# EAGLE board 04A-005-A101 (EAGLE 9.6.2)
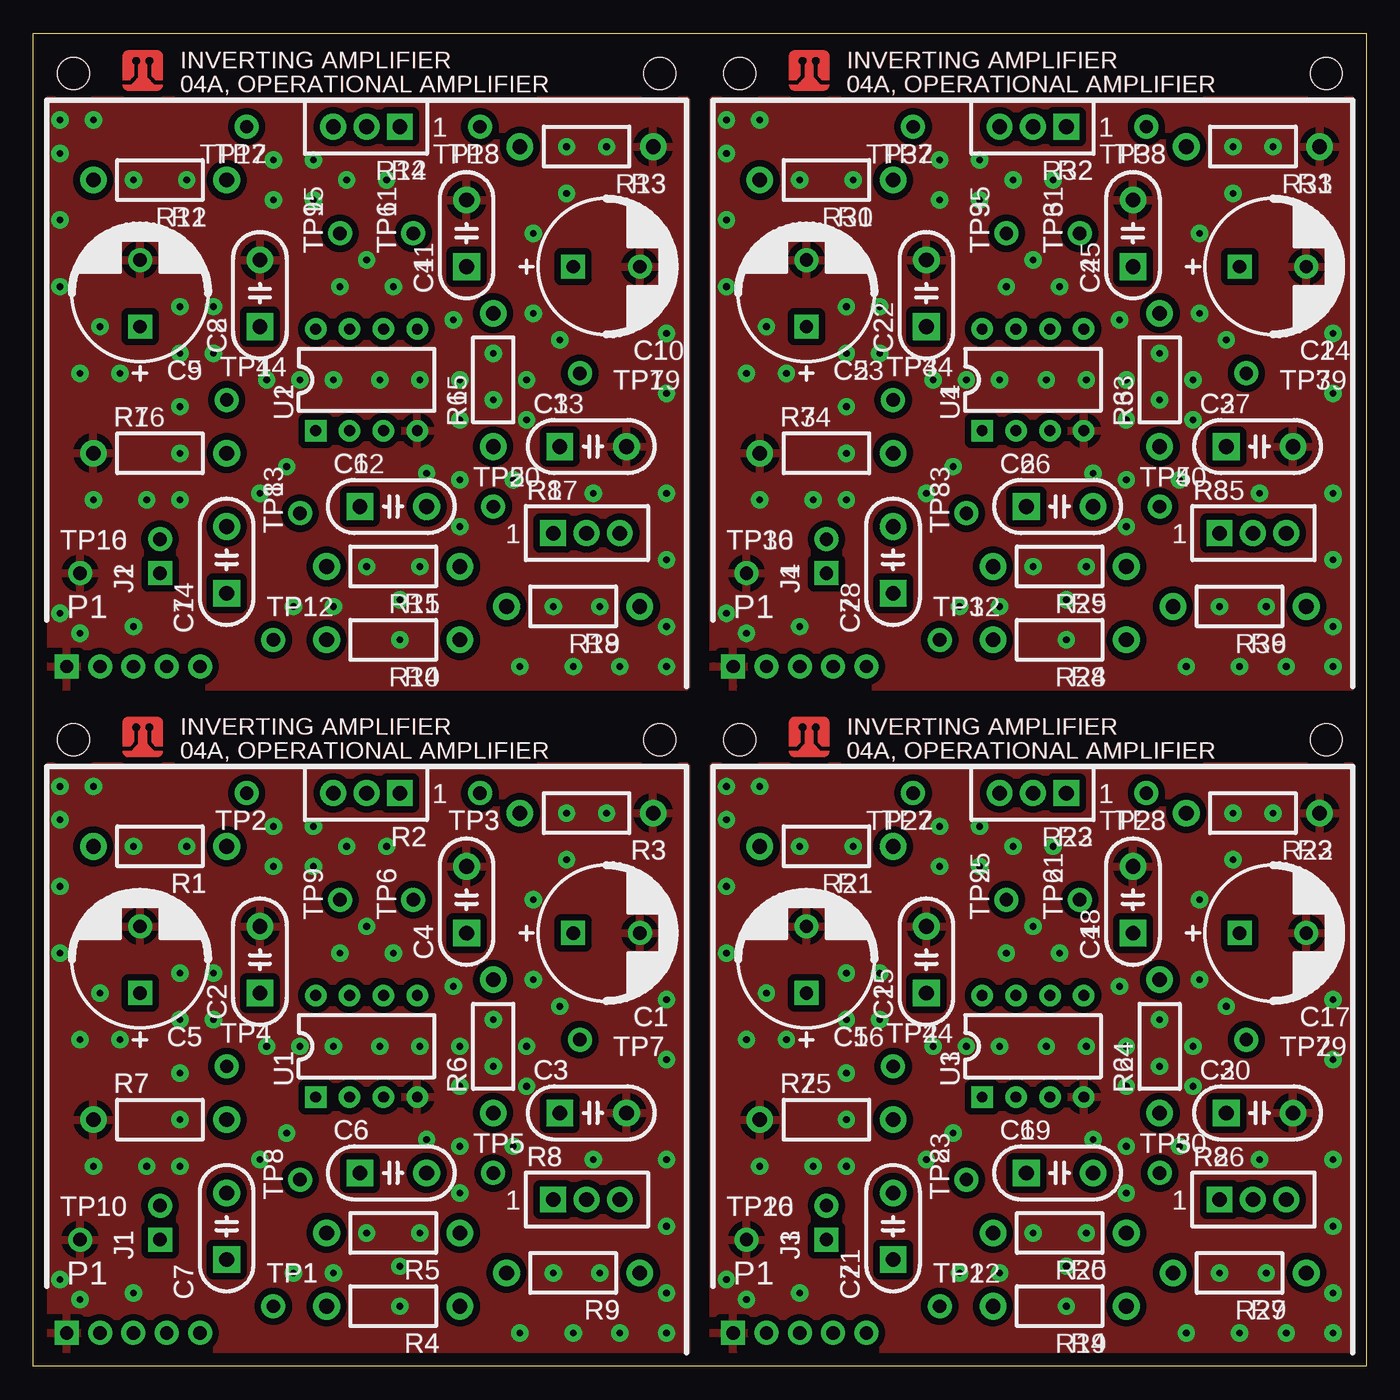
[diagram p0: board, top side]
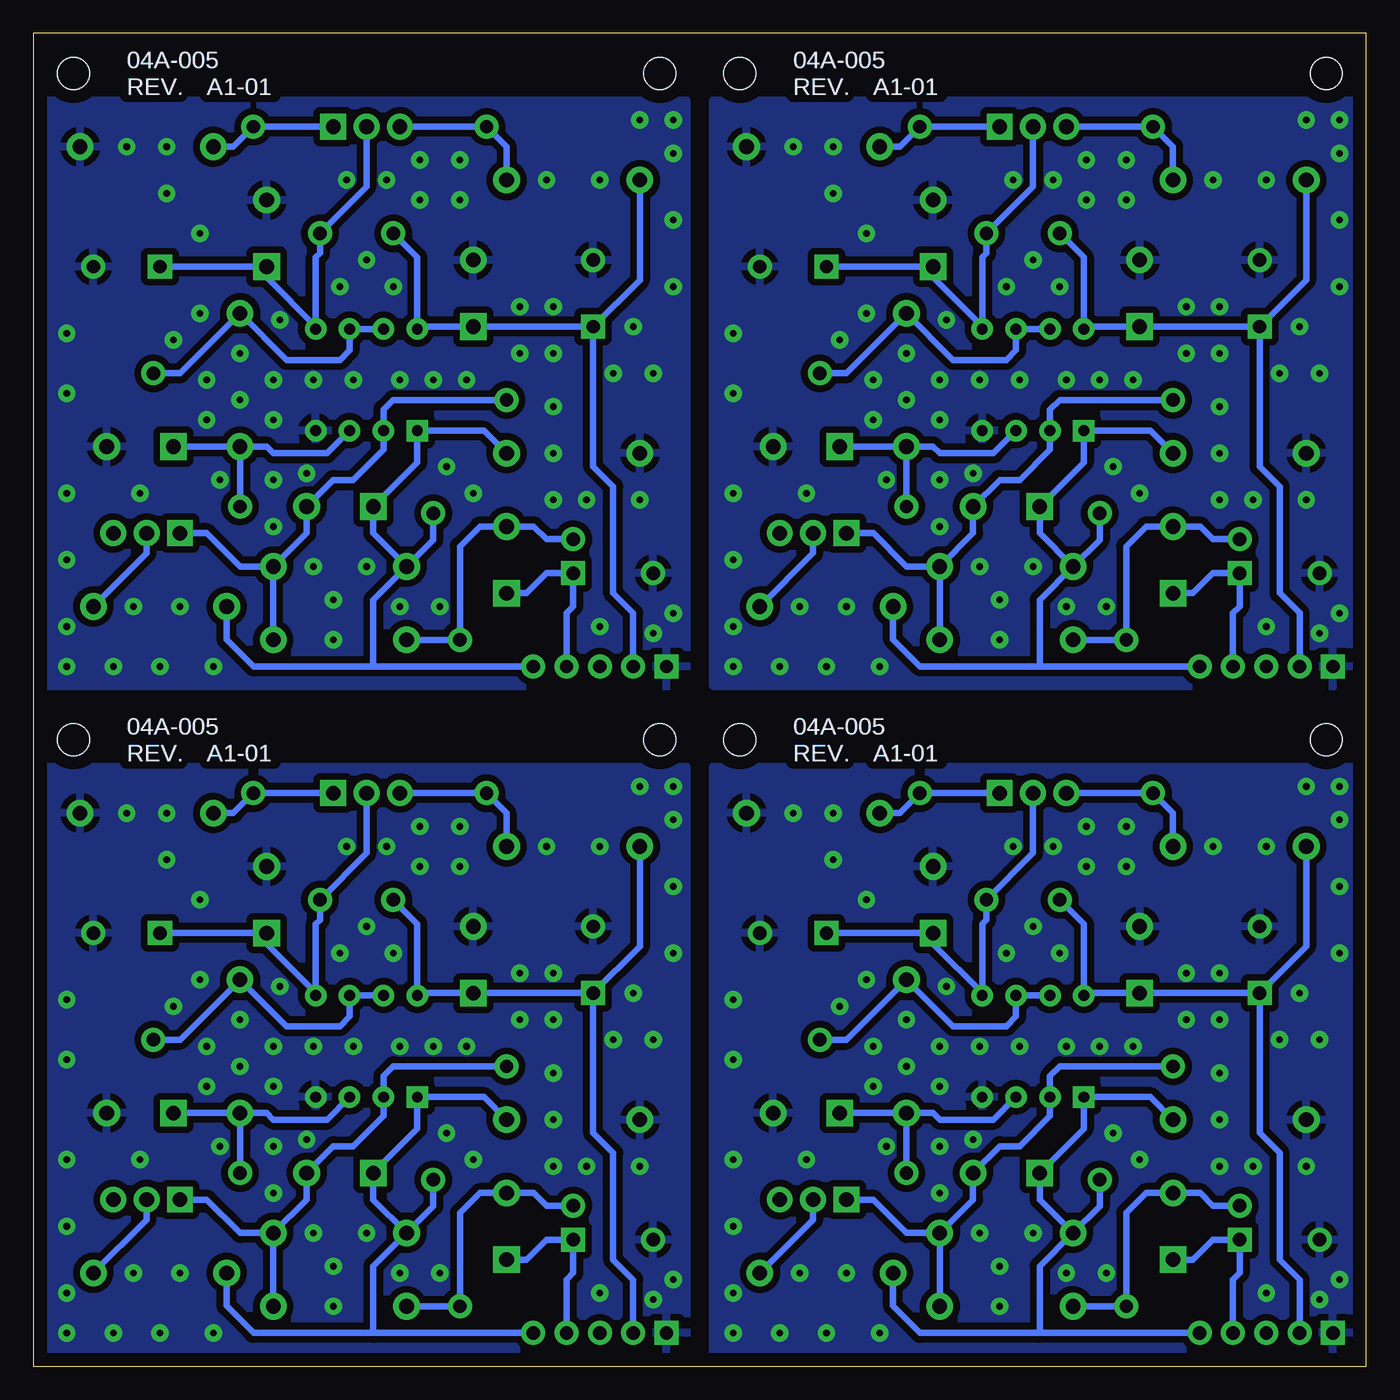
[diagram p1: board, bottom side, seen from below]

Size 100 x 100 mm. Coordinates in mm from the lower left corner, seen from the top.
Outline: 0,0 0,100 100,100 100,0 0,0
Copper layers (1*16): Top 0.035mm / dielectric 1.5mm / Bottom 0.035mm
Design rules "minipcb-THD": minimum track width 0.5mm, minimum drill 0.5mm, track to track 0.5mm, track to pad 0.5mm, pad to pad 0.5mm, via to via 0.5mm, smd to smd 0mil, copper to edge 1mm, drill to drill 1mm, minimum pad ring 0.4mm, minimum via ring 0.4mm, stop-mask expansion 0.1mm, vias tented up to drill 0.6mm, thermal gap 0.5mm

## Footprints (pad centres in the part's own frame; a part is rotated, then mirrored left to right if it is on the bottom)
C5MM = drill 1 square: + -2.5,0 | drill 1: - 2.5,0
C050-024X044 = drill 1.1 pad 2 square: 1 -2.5,0 | drill 1.1 pad 2: 2 2.5,0
PINS_2 = drill 1 square: 1 0,0 | drill 1: 2 2.54,0
PINS_1X5 = drill 1 square: 1 0,0 | drill 1: 2 2.5,0; 3 5,0; 4 7.5,0; 5 10,0
0207/10 = drill 1.1 pad 2: 1 -5,0; 2 5,0
TRIM_0100 = drill 1.1 pad 1.93 square: 1 0,0 | drill 1.1 pad 1.93: 2 2.5,0; 3 5,0
PINS_1_TESTPOINT_KE5000_NOTEXT = drill 1: 1 0,0
DIL08 = drill 0.813 square: 1 -3.81,-3.81 | drill 0.813: 2 -1.27,-3.81; 3 1.27,-3.81; 4 3.81,-3.81; 5 3.81,3.81; 6 1.27,3.81; 7 -1.27,3.81; 8 -3.81,3.81
MINIPCB_0P_50X50MM = hole 2.4: 47,47; 3,47

## Placement (x,y rotation side)
C1  [C5MM]  43,32.5 0 top
C2  [C050-024X044]  17,30.5 90 top
C3  [C050-024X044]  42,19 0 top
C4  [C050-024X044]  32.5,35 90 top
C5  [C5MM]  8,30.5 90 top
C6  [C050-024X044]  27,14.5 0 top
C7  [C050-024X044]  14.5,10.5 90 top
C8  [C050-024X044]  17,80.5 90 top
C9  [C5MM]  8,80.5 90 top
C10  [C5MM]  43,82.5 0 top
C11  [C050-024X044]  32.5,85 90 top
C12  [C050-024X044]  27,64.5 0 top
C13  [C050-024X044]  42,69 0 top
C14  [C050-024X044]  14.5,60.5 90 top
C15  [C050-024X044]  67,30.5 90 top
C16  [C5MM]  58,30.5 90 top
C17  [C5MM]  93,32.5 0 top
C18  [C050-024X044]  82.5,35 90 top
C19  [C050-024X044]  77,14.5 0 top
C20  [C050-024X044]  92,19 0 top
C21  [C050-024X044]  64.5,10.5 90 top
C22  [C050-024X044]  67,80.5 90 top
C23  [C5MM]  58,80.5 90 top
C24  [C5MM]  93,82.5 0 top
C25  [C050-024X044]  82.5,85 90 top
C26  [C050-024X044]  77,64.5 0 top
C27  [C050-024X044]  92,69 0 top
C28  [C050-024X044]  64.5,60.5 90 top
J1  JUMPER  [PINS_2]  9.5,9.5 90 top
J2  JUMPER  [PINS_2]  9.5,59.5 90 top
J3  JUMPER  [PINS_2]  59.5,9.5 90 top
J4  JUMPER  [PINS_2]  59.5,59.5 90 top
P1  [PINS_1X5]  2.5,2.5 0 top
P2  [PINS_1X5]  2.5,52.5 0 top
P3  [PINS_1X5]  52.5,2.5 0 top
P4  [PINS_1X5]  52.5,52.5 0 top
R1  [0207/10]  9.5,39 180 top
R2  [TRIM_0100]  27.5,43 180 top
R3  [0207/10]  41.5,41.5 180 top
R4  [0207/10]  27,4.5 180 top
R5  [0207/10]  27,10 180 top
R6  [0207/10]  34.5,24 90 top
R7  [0207/10]  9.5,18.5 0 top
R8  [TRIM_0100]  39,12.5 0 top
R9  [0207/10]  40.5,7 180 top
R10  [0207/10]  27,54.5 180 top
R11  [0207/10]  27,60 180 top
R12  [0207/10]  9.5,89 180 top
R13  [0207/10]  41.5,91.5 180 top
R14  [TRIM_0100]  27.5,93 180 top
R15  [0207/10]  34.5,74 90 top
R16  [0207/10]  9.5,68.5 0 top
R17  [TRIM_0100]  39,62.5 0 top
R18  [0207/10]  40.5,57 180 top
R19  [0207/10]  77,4.5 180 top
R20  [0207/10]  77,10 180 top
R21  [0207/10]  59.5,39 180 top
R22  [0207/10]  91.5,41.5 180 top
R23  [TRIM_0100]  77.5,43 180 top
R24  [0207/10]  84.5,24 90 top
R25  [0207/10]  59.5,18.5 0 top
R26  [TRIM_0100]  89,12.5 0 top
R27  [0207/10]  90.5,7 180 top
R28  [0207/10]  77,54.5 180 top
R29  [0207/10]  77,60 180 top
R30  [0207/10]  59.5,89 180 top
R31  [0207/10]  91.5,91.5 180 top
R32  [TRIM_0100]  77.5,93 180 top
R33  [0207/10]  84.5,74 90 top
R34  [0207/10]  59.5,68.5 0 top
R35  [TRIM_0100]  89,62.5 0 top
R36  [0207/10]  90.5,57 180 top
TP1  [PINS_1_TESTPOINT_KE5000_NOTEXT]  18,4.5 0 top
TP2  [PINS_1_TESTPOINT_KE5000_NOTEXT]  16,43 180 top
TP3  [PINS_1_TESTPOINT_KE5000_NOTEXT]  33.5,43 180 top
TP4  [PINS_1_TESTPOINT_KE5000_NOTEXT]  14.5,22.5 0 top
TP5  [PINS_1_TESTPOINT_KE5000_NOTEXT]  34.5,14.5 0 top
TP6  [PINS_1_TESTPOINT_KE5000_NOTEXT]  28.5,35 90 top
TP7  [PINS_1_TESTPOINT_KE5000_NOTEXT]  41,24.5 0 top
TP8  [PINS_1_TESTPOINT_KE5000_NOTEXT]  20,14 90 top
TP9  [PINS_1_TESTPOINT_KE5000_NOTEXT]  23,35 90 top
TP10  [PINS_1_TESTPOINT_KE5000_NOTEXT]  3.5,9.5 0 top
TP11  [PINS_1_TESTPOINT_KE5000_NOTEXT]  28.5,85 90 top
TP12  [PINS_1_TESTPOINT_KE5000_NOTEXT]  18,54.5 0 top
TP13  [PINS_1_TESTPOINT_KE5000_NOTEXT]  20,64 90 top
TP14  [PINS_1_TESTPOINT_KE5000_NOTEXT]  14.5,72.5 0 top
TP15  [PINS_1_TESTPOINT_KE5000_NOTEXT]  23,85 90 top
TP16  [PINS_1_TESTPOINT_KE5000_NOTEXT]  3.5,59.5 0 top
TP17  [PINS_1_TESTPOINT_KE5000_NOTEXT]  16,93 180 top
TP18  [PINS_1_TESTPOINT_KE5000_NOTEXT]  33.5,93 180 top
TP19  [PINS_1_TESTPOINT_KE5000_NOTEXT]  41,74.5 0 top
TP20  [PINS_1_TESTPOINT_KE5000_NOTEXT]  34.5,64.5 0 top
TP21  [PINS_1_TESTPOINT_KE5000_NOTEXT]  78.5,35 90 top
TP22  [PINS_1_TESTPOINT_KE5000_NOTEXT]  68,4.5 0 top
TP23  [PINS_1_TESTPOINT_KE5000_NOTEXT]  70,14 90 top
TP24  [PINS_1_TESTPOINT_KE5000_NOTEXT]  64.5,22.5 0 top
TP25  [PINS_1_TESTPOINT_KE5000_NOTEXT]  73,35 90 top
TP26  [PINS_1_TESTPOINT_KE5000_NOTEXT]  53.5,9.5 0 top
TP27  [PINS_1_TESTPOINT_KE5000_NOTEXT]  66,43 180 top
TP28  [PINS_1_TESTPOINT_KE5000_NOTEXT]  83.5,43 180 top
TP29  [PINS_1_TESTPOINT_KE5000_NOTEXT]  91,24.5 0 top
TP30  [PINS_1_TESTPOINT_KE5000_NOTEXT]  84.5,14.5 0 top
TP31  [PINS_1_TESTPOINT_KE5000_NOTEXT]  78.5,85 90 top
TP32  [PINS_1_TESTPOINT_KE5000_NOTEXT]  68,54.5 0 top
TP33  [PINS_1_TESTPOINT_KE5000_NOTEXT]  70,64 90 top
TP34  [PINS_1_TESTPOINT_KE5000_NOTEXT]  64.5,72.5 0 top
TP35  [PINS_1_TESTPOINT_KE5000_NOTEXT]  73,85 90 top
TP36  [PINS_1_TESTPOINT_KE5000_NOTEXT]  53.5,59.5 0 top
TP37  [PINS_1_TESTPOINT_KE5000_NOTEXT]  66,93 180 top
TP38  [PINS_1_TESTPOINT_KE5000_NOTEXT]  83.5,93 180 top
TP39  [PINS_1_TESTPOINT_KE5000_NOTEXT]  91,74.5 0 top
TP40  [PINS_1_TESTPOINT_KE5000_NOTEXT]  84.5,64.5 0 top
U1  [DIL08]  25,24 0 top
U2  [DIL08]  25,74 0 top
U3  [DIL08]  75,24 0 top
U4  [DIL08]  75,74 0 top
U$1  MINIPCB_50X50  [MINIPCB_0P_50X50MM]  0,0 0 top
U$2  MINIPCB_50X50  [MINIPCB_0P_50X50MM]  0,50 0 top
U$3  MINIPCB_50X50  [MINIPCB_0P_50X50MM]  50,0 0 top
U$4  MINIPCB_50X50  [MINIPCB_0P_50X50MM]  50,50 0 top

## Library data of the parts
C1-C28 J1-J4 P1-P4 R1-R36 TP1-TP40 U1-U4 = minipcb
U$1-U$4 = minipcb; CIRCUIT_CATEGORY: 04A, OPERATIONAL AMPLIFIER; PART_NUMBER: 04A-005; REVISION: A1-01; TITLE: INVERTING AMPLIFIER

## Nets
GND: C1.- C2.2 C3.2 C4.2 C5.- P1.1 R3.1 R7.1 TP10.1 U1.4
GND1: C8.2 C9.- C10.- C11.2 C13.2 P2.1 R13.1 R16.1 TP16.1 U2.4
GND2: C15.2 C16.- C17.- C18.2 C20.2 P3.1 R22.1 R25.1 TP26.1 U3.4
GND3: C22.2 C23.- C24.- C25.2 C27.2 P4.1 R31.1 R34.1 TP36.1 U4.4
IN: C7.1 J1.1 P1.4
IN1: C14.1 J2.1 P2.4
IN2: C21.1 J3.1 P3.4
IN3: C28.1 J4.1 P4.4
IN-DC: C7.2 J1.2 R4.2 TP1.1
IN-DC1: C14.2 J2.2 R10.2 TP12.1
IN-DC2: C21.2 J3.2 R19.2 TP22.1
IN-DC3: C28.2 J4.2 R28.2 TP32.1
N$1: R8.2 R9.1
N$2: R17.2 R18.1
N$3: R26.2 R27.1
N$4: R35.2 R36.1
NC: P1.3
NC1: P2.3
NC2: P3.3
NC3: P4.3
OUT: C6.1 P1.5 R5.2 R7.2 R9.2 TP8.1 U1.1
OUT1: C12.1 P2.5 R11.2 R16.2 R18.2 TP13.1 U2.1
OUT2: C19.1 P3.5 R20.2 R25.2 R27.2 TP23.1 U3.1
OUT3: C26.1 P4.5 R29.2 R34.2 R36.2 TP33.1 U4.1
P1.1: R2.1 R3.2 TP3.1
P1.2: R12.1 R14.3 TP17.1
P1.3: R1.1 R2.3 TP2.1
P1.4: R13.2 R14.1 TP18.1
P1.5: R21.1 R23.3 TP27.1
P1.6: R22.2 R23.1 TP28.1
P1.7: R30.1 R32.3 TP37.1
P1.8: R31.2 R32.1 TP38.1
V+: C2.1 C5.+ P1.2 R1.2 TP9.1 U1.8
V+1: C8.1 C9.+ P2.2 R12.2 TP15.1 U2.8
V+2: C15.1 C16.+ P3.2 R21.2 TP25.1 U3.8
V+3: C22.1 C23.+ P4.2 R30.2 TP35.1 U4.8
VFB: C6.2 R4.1 R5.1 R8.1 TP4.1 U1.2
VFB1: C12.2 R10.1 R11.1 R17.1 TP14.1 U2.2
VFB2: C19.2 R19.1 R20.1 R26.1 TP24.1 U3.2
VFB3: C26.2 R28.1 R29.1 R35.1 TP34.1 U4.2
VR: C1.+ C4.1 R2.2 TP6.1 U1.5
VR1: C10.+ C11.1 R14.2 TP11.1 U2.5
VR2: C17.+ C18.1 R23.2 TP21.1 U3.5
VR3: C24.+ C25.1 R32.2 TP31.1 U4.5
VREF: R6.2 TP7.1 U1.6 U1.7
VREF1: R15.2 TP19.1 U2.6 U2.7
VREF2: R24.2 TP29.1 U3.6 U3.7
VREF3: R33.2 TP39.1 U4.6 U4.7
VREF+: C3.1 R6.1 TP5.1 U1.3
VREF+1: C13.1 R15.1 TP20.1 U2.3
VREF+2: C20.1 R24.1 TP30.1 U3.3
VREF+3: C27.1 R33.1 TP40.1 U4.3

## Tracks (layer width: path | path; a pad name or v marks a point on that pad's centre or on a via)
GND  (via drill 0.5)
  other vias: 26,24 32,24 31.5,28.5 32,21 25,33 21,37.5 26.5,39 4.5,43.5 2,43.5 2,41 2,31 6.5,24.5 11,29.5 13.5,29.5 37.5,35 37.5,29 7.5,39 47.5,2.5 47.5,5.5 44,2.5 3.5,24.5 36,16.5 25,10 19,17.5 2,6.5 3.5,5 11.5,39 39.5,27 34.5,26 34.5,22.5 27.5,4.5 47.5,27.5 47.5,23 47.5,15.5 47.5,10.5 43,41.5 40,41.5 40,38 27.5,7.5 22.5,24 29,24 20,24 23,31 27,31 18,40.5 21,40.5 18,37.5 23.5,39 11,26 13.5,26 17.5,24 5,28 2,36 11,18.5 11,22 8.5,15 4.5,15 7.5,5.5 42,15.5 39,7 36.5,2.5 42.5,7 29,10 40.5,2.5 11,15 37,24 37,21 22.5,7 19.5,7 17,15.5 32,16.5 29.5,17 32,13
  pour Top: 1,1 49,1 49,45 1,45
  pour Bottom (isolate 0.3): 1,1 49,1 49,45 1,45
GND1  (via drill 0.5)
  other vias: 26,74 32,74 31.5,78.5 32,71 25,83 21,87.5 26.5,89 4.5,93.5 2,93.5 2,91 2,81 6.5,74.5 11,79.5 13.5,79.5 37.5,85 37.5,79 7.5,89 47.5,52.5 47.5,55.5 44,52.5 3.5,74.5 36,66.5 25,60 19,67.5 2,56.5 3.5,55 11.5,89 39.5,77 34.5,76 34.5,72.5 27.5,54.5 47.5,77.5 47.5,73 47.5,65.5 47.5,60.5 43,91.5 40,91.5 40,88 27.5,57.5 22.5,74 29,74 20,74 23,81 27,81 18,90.5 21,90.5 18,87.5 23.5,89 11,76 13.5,76 17.5,74 5,78 2,86 11,68.5 11,72 8.5,65 4.5,65 7.5,55.5 42,65.5 39,57 36.5,52.5 42.5,57 29,60 40.5,52.5 11,65 37,74 37,71 22.5,57 19.5,57 17,65.5 32,66.5 29.5,67 32,63
  pour Top: 1,51 49,51 49,95 1,95
  pour Bottom (isolate 0.3): 1,51 49,51 49,95 1,95
GND2  (via drill 0.5)
  other vias: 76,24 82,24 81.5,28.5 82,21 75,33 71,37.5 76.5,39 54.5,43.5 52,43.5 52,41 52,31 56.5,24.5 61,29.5 63.5,29.5 87.5,35 87.5,29 57.5,39 97.5,2.5 97.5,5.5 94,2.5 53.5,24.5 86,16.5 75,10 69,17.5 52,6.5 53.5,5 61.5,39 89.5,27 84.5,26 84.5,22.5 77.5,4.5 97.5,27.5 97.5,23 97.5,15.5 97.5,10.5 93,41.5 90,41.5 90,38 77.5,7.5 72.5,24 79,24 70,24 73,31 77,31 68,40.5 71,40.5 68,37.5 73.5,39 61,26 63.5,26 67.5,24 55,28 52,36 61,18.5 61,22 58.5,15 54.5,15 57.5,5.5 92,15.5 89,7 86.5,2.5 92.5,7 79,10 90.5,2.5 61,15 87,24 87,21 72.5,7 69.5,7 67,15.5 82,16.5 79.5,17 82,13
  pour Top: 51,1 99,1 99,45 51,45
  pour Bottom (isolate 0.3): 51,1 99,1 99,45 51,45
GND3  (via drill 0.5)
  other vias: 76,74 82,74 81.5,78.5 82,71 75,83 71,87.5 76.5,89 54.5,93.5 52,93.5 52,91 52,81 56.5,74.5 61,79.5 63.5,79.5 87.5,85 87.5,79 57.5,89 97.5,52.5 97.5,55.5 94,52.5 53.5,74.5 86,66.5 75,60 69,67.5 52,56.5 53.5,55 61.5,89 89.5,77 84.5,76 84.5,72.5 77.5,54.5 97.5,77.5 97.5,73 97.5,65.5 97.5,60.5 93,91.5 90,91.5 90,88 77.5,57.5 72.5,74 79,74 70,74 73,81 77,81 68,90.5 71,90.5 68,87.5 73.5,89 61,76 63.5,76 67.5,74 55,78 52,86 61,68.5 61,72 58.5,65 54.5,65 57.5,55.5 92,65.5 89,57 86.5,52.5 92.5,57 79,60 90.5,52.5 61,65 87,74 87,71 72.5,57 69.5,57 67,65.5 82,66.5 79.5,67 82,63
  pour Top: 51,51 99,51 99,95 51,95
  pour Bottom (isolate 0.3): 51,51 99,51 99,95 51,95
IN
  Bottom 0.5: C7.1 13,8 11.5,9.5 J1.1 9.5,7 10,6.5 P1.4
IN1
  Bottom 0.5: C14.1 13,58 11.5,59.5 J2.1 9.5,57 10,56.5 P2.4
IN2
  Bottom 0.5: C21.1 63,8 61.5,9.5 J3.1 59.5,7 60,6.5 P3.4
IN3
  Bottom 0.5: C28.1 63,58 61.5,59.5 J4.1 59.5,57 60,56.5 P4.4
IN-DC
  Bottom 0.5: R4.2 TP1.1 18,11.5 16.5,13 C7.2 12.46,13 11.5,12.04 J1.2
IN-DC1
  Bottom 0.5: R10.2 TP12.1 18,61.5 16.5,63 C14.2 12.46,63 11.5,62.04 J2.2
IN-DC2
  Bottom 0.5: R19.2 TP22.1 68,11.5 66.5,13 C21.2 62.46,13 61.5,12.04 J3.2
IN-DC3
  Bottom 0.5: R28.2 TP32.1 68,61.5 66.5,63 C28.2 62.46,63 61.5,62.04 J4.2
N$1
  Bottom 0.5: R9.1 41.5,11 R8.2
N$2
  Bottom 0.5: R18.1 41.5,61 R17.2
N$3
  Bottom 0.5: R27.1 91.5,11 R26.2
N$4
  Bottom 0.5: R36.1 91.5,61 R35.2
OUT
  Bottom 0.5: R5.2 24.5,12.5 C6.1 21.19,17.81 U1.1 16.19,20.19 R7.2 | TP8.1 20,12 R5.2 | P1.5 24.5,2.5 | 24.5,2.5 33.48,2.5 35.5,4.52 R9.2 | R5.2 24.5,7.5 24.5,2.5
OUT1
  Bottom 0.5: R11.2 24.5,62.5 C12.1 21.19,67.81 U2.1 16.19,70.19 R16.2 | TP13.1 20,62 R11.2 | P2.5 24.5,52.5 | 24.5,52.5 33.48,52.5 35.5,54.52 R18.2 | R11.2 24.5,57.5 24.5,52.5
OUT2
  Bottom 0.5: R20.2 74.5,12.5 C19.1 71.19,17.81 U3.1 66.19,20.19 R25.2 | TP23.1 70,12 R20.2 | P3.5 74.5,2.5 | 74.5,2.5 83.48,2.5 85.5,4.52 R27.2 | R20.2 74.5,7.5 74.5,2.5
OUT3
  Bottom 0.5: R29.2 74.5,62.5 C26.1 71.19,67.81 U4.1 66.19,70.19 R34.2 | TP33.1 70,62 R29.2 | P4.5 74.5,52.5 | 74.5,52.5 83.48,52.5 85.5,54.52 R36.2 | R29.2 74.5,57.5 74.5,52.5
P1.1
  Bottom 0.5: R2.1 TP3.1 35,41.5 R3.2
P1.2
  Bottom 0.5: R12.1 14.5,91.5 TP17.1 R14.3
P1.3
  Bottom 0.5: R1.1 14.5,41.5 TP2.1 R2.3
P1.4
  Bottom 0.5: R14.1 TP18.1 35,91.5 R13.2
P1.5
  Bottom 0.5: R21.1 64.5,41.5 TP27.1 R23.3
P1.6
  Bottom 0.5: R23.1 TP28.1 85,41.5 R22.2
P1.7
  Bottom 0.5: R30.1 64.5,91.5 TP37.1 R32.3
P1.8
  Bottom 0.5: R32.1 TP38.1 85,91.5 R31.2
V+
  Bottom 0.5: C5.+ 4.5,31.5 R1.2 | C5.+ C2.1 21,28 U1.8 21.19,33.19 TP9.1 | C5.+ 8,17.5 6.5,16 6.5,8 5,6.5 P1.2
V+1
  Bottom 0.5: C9.+ 4.5,81.5 R12.2 | C9.+ C8.1 21,78 U2.8 21.19,83.19 TP15.1 | C9.+ 8,67.5 6.5,66 6.5,58 5,56.5 P2.2
V+2
  Bottom 0.5: C16.+ 54.5,31.5 R21.2 | C16.+ C15.1 71,28 U3.8 71.19,33.19 TP25.1 | C16.+ 58,17.5 56.5,16 56.5,8 55,6.5 P3.2
V+3
  Bottom 0.5: C23.+ 54.5,81.5 R30.2 | C23.+ C22.1 71,78 U4.8 71.19,83.19 TP35.1 | C23.+ 58,67.5 56.5,66 56.5,58 55,56.5 P4.2
VFB
  Bottom 0.5: R5.1 29.5,12.5 C6.2 27.5,16.5 26,16.5 23.73,18.77 U1.2 23.73,21.77 23,22.5 TP4.1 | R4.1 R5.1 | R5.1 34.48,10 36.98,12.5 R8.1
VFB1
  Bottom 0.5: R11.1 29.5,62.5 C12.2 27.5,66.5 26,66.5 23.73,68.77 U2.2 23.73,71.77 23,72.5 TP14.1 | R10.1 R11.1 | R11.1 34.48,60 36.98,62.5 R17.1
VFB2
  Bottom 0.5: R20.1 79.5,12.5 C19.2 77.5,16.5 76,16.5 73.73,18.77 U3.2 73.73,21.77 73,22.5 TP24.1 | R19.1 R20.1 | R20.1 84.48,10 86.98,12.5 R26.1
VFB3
  Bottom 0.5: R29.1 79.5,62.5 C26.2 77.5,66.5 76,66.5 73.73,68.77 U4.2 73.73,71.77 73,72.5 TP34.1 | R28.1 R29.1 | R29.1 84.48,60 86.98,62.5 R35.1
VR
  Bottom 0.5: R2.2 25,38.5 TP6.1 28.5,33.5 28.81,33.19 28.81,28 | 28.81,28 32.5,31.69 C4.1 C1.+ | U1.5 28.81,28
VR1
  Bottom 0.5: R14.2 25,88.5 TP11.1 28.5,83.5 28.81,83.19 28.81,78 | 28.81,78 32.5,81.69 C11.1 C10.+ | U2.5 28.81,78
VR2
  Bottom 0.5: R23.2 75,38.5 TP21.1 78.5,33.5 78.81,33.19 78.81,28 | 78.81,28 82.5,31.69 C18.1 C17.+ | U3.5 78.81,28
VR3
  Bottom 0.5: R32.2 75,88.5 TP31.1 78.5,83.5 78.81,83.19 78.81,78 | 78.81,78 82.5,81.69 C25.1 C24.+ | U4.5 78.81,78
VREF
  Bottom 0.5: TP7.1 39,24.5 R6.2 31,25.5 27,25.5 26.27,26.23 U1.6 U1.7
VREF1
  Bottom 0.5: TP19.1 39,74.5 R15.2 31,75.5 27,75.5 26.27,76.23 U2.6 U2.7
VREF2
  Bottom 0.5: TP29.1 89,24.5 R24.2 81,25.5 77,25.5 76.27,26.23 U3.6 U3.7
VREF3
  Bottom 0.5: TP39.1 89,74.5 R33.2 81,75.5 77,75.5 76.27,76.23 U4.6 U4.7
VREF+
  Bottom 0.5: R6.1 TP5.1 | R6.1 C3.1 | U1.3 27.96,18.5 32,18.5 32.5,19 R6.1
VREF+1
  Bottom 0.5: R15.1 TP20.1 | R15.1 C13.1 | U2.3 27.96,68.5 32,68.5 32.5,69 R15.1
VREF+2
  Bottom 0.5: R24.1 TP30.1 | R24.1 C20.1 | U3.3 77.96,18.5 82,18.5 82.5,19 R24.1
VREF+3
  Bottom 0.5: R33.1 TP40.1 | R33.1 C27.1 | U4.3 77.96,68.5 82,68.5 82.5,69 R33.1

## Text on the board
_tPlace: J1 | J1 | J1 | J1
_tNames: TP2 | TP3 | TP2 | TP3 | R2 | R2 | R3 | R3 | R1 | R1 | TP9 | TP6 | TP9 | TP6 | C4 | C4 | C2 | C1 | C2 | C1 | C5 | TP4 | C5 | TP4 | TP7 | TP7 | C3 | C3 | R7 | U1 | R6 | R7 | U1 | R6 | C6 | C6 | TP5 | TP5 | R8 | R8 | TP8 | TP8 | TP10 | TP10 | R5 | R5 | TP1 | TP1 | C7 | R9 | C7 | R9 | R4 | R4 | TP2 | TP3 | TP2 | TP3 | R2 | R2 | R3 | R3 | R1 | R1 | TP9 | TP6 | TP9 | TP6 | C4 | C4 | C2 | C1 | C2 | C1 | C5 | TP4 | C5 | TP4 | TP7 | TP7 | C3 | C3 | R7 | U1 | R6 | R7 | U1 | R6 | C6 | C6 | TP5 | TP5 | R8 | R8 | TP8 | TP8 | TP10 | TP10 | R5 | R5 | TP1 | TP1 | C7 | R9 | C7 | R9 | R4 | R4